# EAGLE board pcb.job (EAGLE 6.5.0)
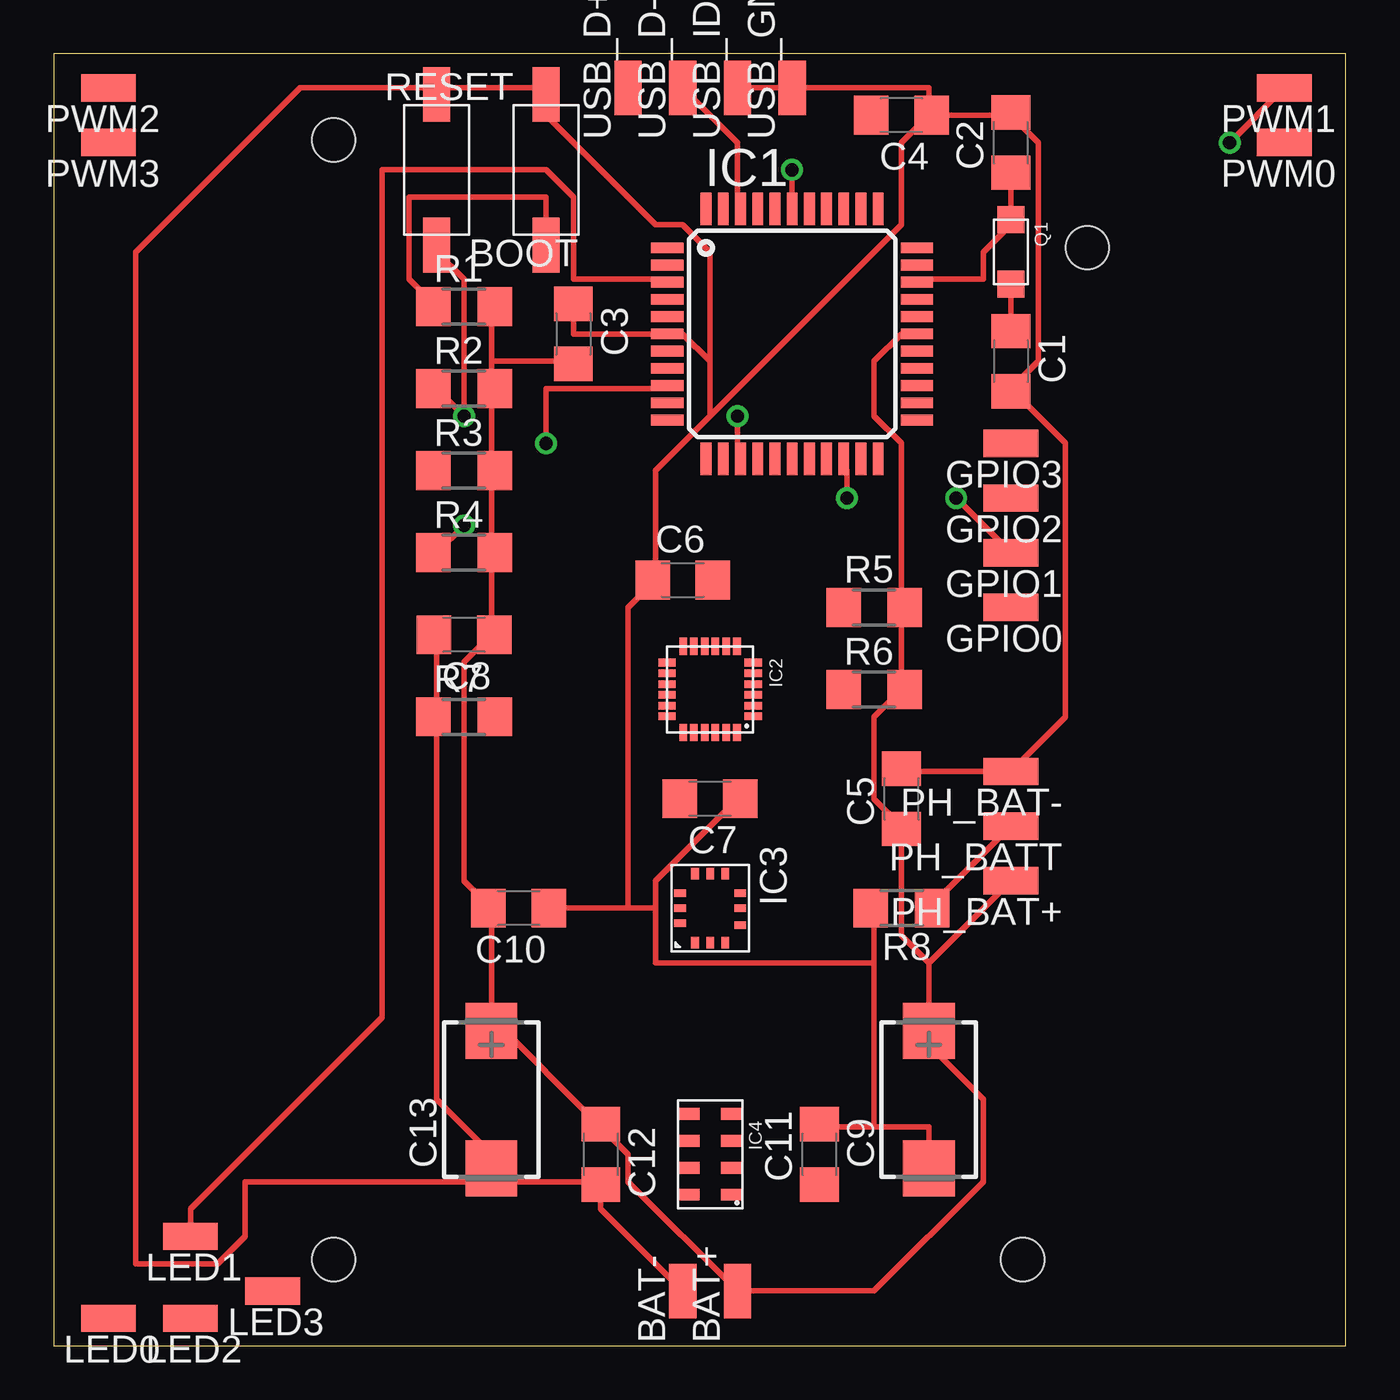
[diagram p0: board, top side]
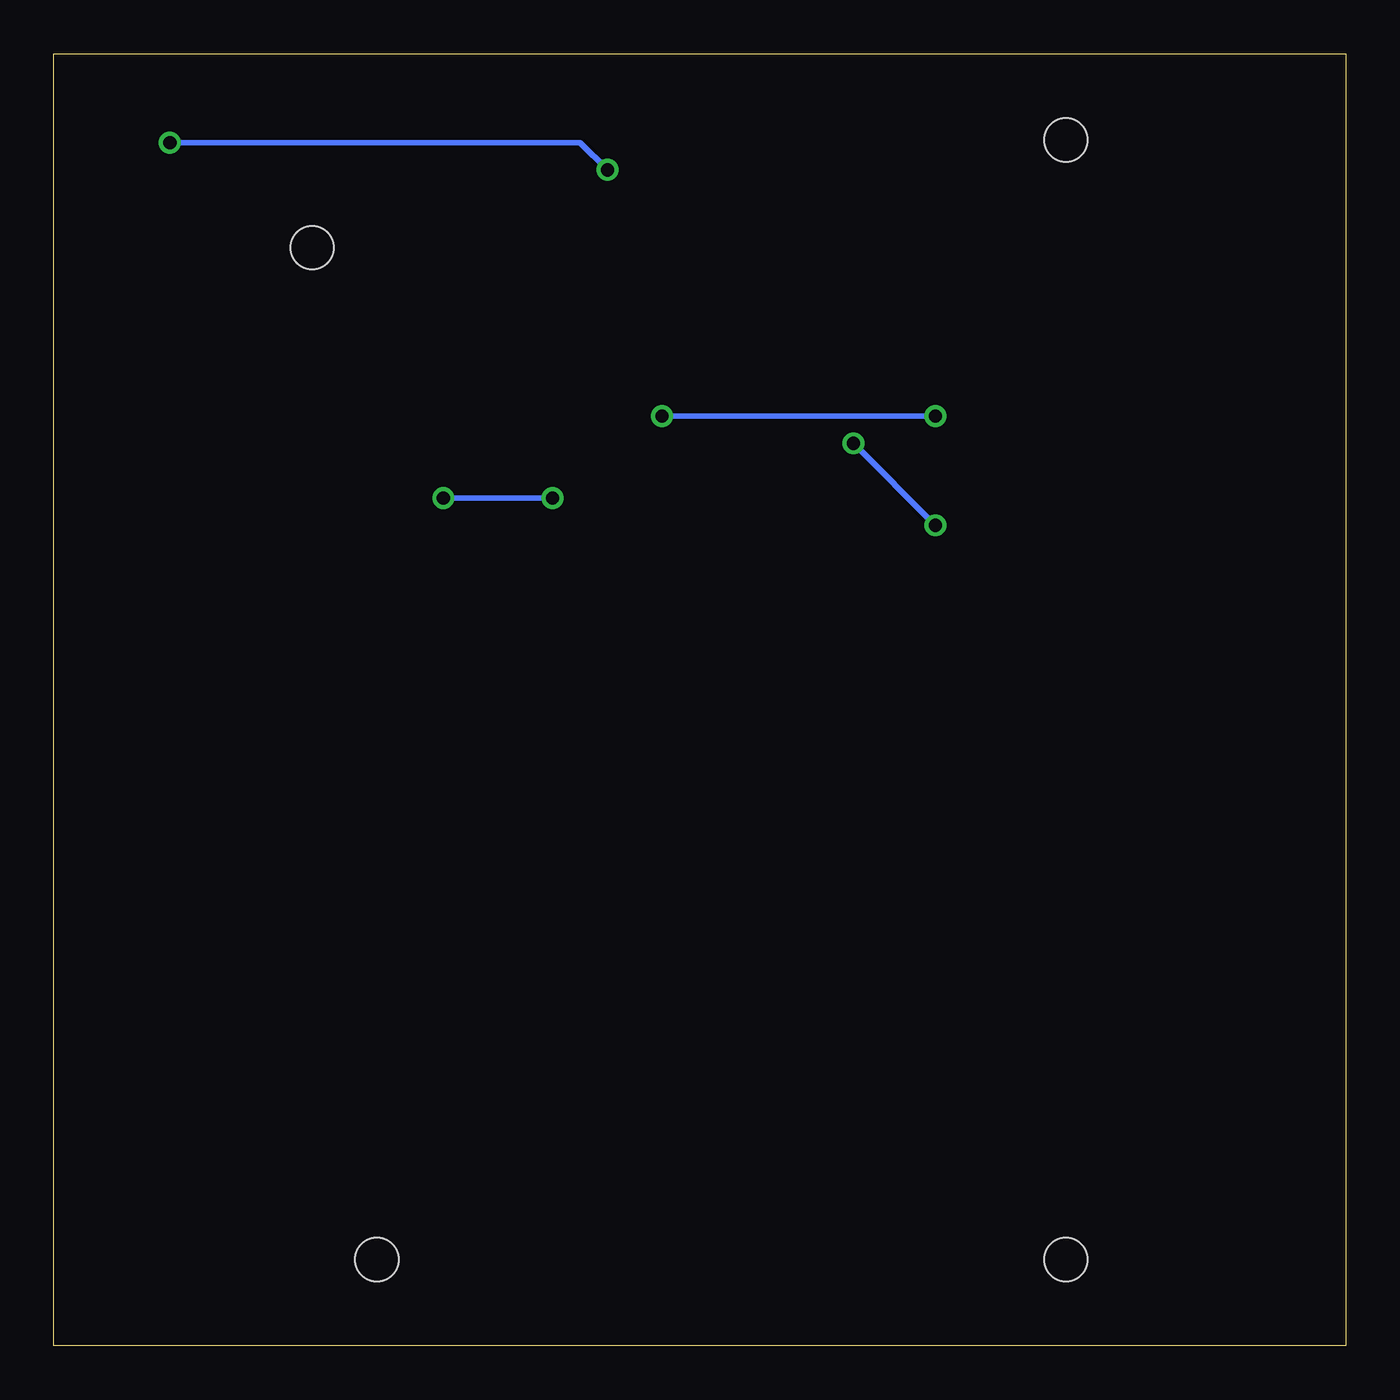
[diagram p1: board, bottom side, seen from below]

Size 60 x 60 mm. Coordinates in mm from the lower left corner, seen from the top.
Outline: 0,0 60,0 60,60 0,60 0,0
Copper layers (1*16): Top 0.035mm / dielectric 1.5mm / Bottom 0.035mm
Design rules "default": minimum track width 10mil, minimum drill 24mil, track to track 8mil, track to pad 8mil, pad to pad 8mil, via to via 8mil, smd to smd 8mil, copper to edge 40mil, drill to drill 8mil, minimum pad ring 10mil, minimum via ring 8mil, stop-mask expansion 4mil, vias tented up to drill 0mil, thermal gap 10mil
Holes 2 mm at 13,4 45,4 13,56 48,51

## Footprints (pad centres in the part's own frame; a part is rotated, then mirrored left to right if it is on the bottom)
SMD1,27-2,54 = smd 1.27 x 2.54: 1 0,0
SW2 = smd 1.27 x 2.54: 1 0,3.5; 2 0,-3.5
C1206 = smd 1.6 x 1.8: 1 -1.4,0; 2 1.4,0
CT7343 = smd 2.6 x 2.4: + 3.2,0; - -3.2,0
TQFP44 = smd 1.5 x 0.5: 1 -5.8,4; 2 -5.8,3.2; 3 -5.8,2.4; 4 -5.8,1.6; 5 -5.8,0.8; 6 -5.8,0; 7 -5.8,-0.8; 8 -5.8,-1.6; 9 -5.8,-2.4; 10 -5.8,-3.2; 11 -5.8,-4; 23 5.8,-4; 24 5.8,-3.2; 25 5.8,-2.4; 26 5.8,-1.6; 27 5.8,-0.8; 28 5.8,0; 29 5.8,0.8; 30 5.8,1.6; 31 5.8,2.4; 32 5.8,3.2; 33 5.8,4 | smd 0.5 x 1.5: 12 -4,-5.8; 13 -3.2,-5.8; 14 -2.4,-5.8; 15 -1.6,-5.8; 16 -0.8,-5.8; 17 0,-5.8; 18 0.8,-5.8; 19 1.6,-5.8; 20 2.4,-5.8; 21 3.2,-5.8; 22 4,-5.8; 34 4,5.8; 35 3.2,5.8; 36 2.4,5.8; 37 1.6,5.8; 38 0.8,5.8; 39 0,5.8; 40 -0.8,5.8; 41 -1.6,5.8; 42 -2.4,5.8; 43 -3.2,5.8; 44 -4,5.8
QFN24 = smd 0.8 x 0.35: 1 -2,1.25; 2 -2,0.75; 3 -2,0.25; 4 -2,-0.25; 5 -2,-0.75; 6 -2,-1.25; 13 2,-1.25; 14 2,-0.75; 15 2,-0.25; 16 2,0.25; 17 2,0.75; 18 2,1.25 | smd 0.35 x 0.8: 7 -1.25,-2; 8 -0.75,-2; 9 -0.25,-2; 10 0.25,-2; 11 0.75,-2; 12 1.25,-2; 19 1.25,2; 20 0.75,2; 21 0.25,2; 22 -0.25,2; 23 -0.75,2; 24 -1.25,2
LGA12 = smd 0.35 x 0.55: 1 0.7,1.6; 2 0,1.6; 3 -0.7,1.6; 7 -0.7,-1.6; 8 0,-1.6; 9 0.7,-1.6 | smd 0.55 x 0.35: 4 -1.4,0.8; 5 -1.4,0; 6 -1.4,-0.7; 10 1.4,-0.7; 11 1.4,0; 12 1.4,0.7
LGA8 = smd 1 x 0.55: 1 -1,1.875; 2 -1,0.625; 3 -1,-0.625; 4 -1,-1.875; 5 1,-1.875; 6 1,-0.625; 7 1,0.625; 8 1,1.875
Q = smd 1.27 x 1.27: 1 0,1.5; 2 0,-1.5
R1206 = smd 1.6 x 1.803: 1 -1.422,0; 2 1.422,0

## Placement (x,y rotation side)
BAT+  [SMD1,27-2,54]  31.75,2.54 0 top
BAT-  [SMD1,27-2,54]  29.21,2.54 0 top
BOOT  SW2  [SW2]  17.78,54.61 0 top
C1  22pF  [C1206]  44.45,45.72 270 top
C2  22pF  [C1206]  44.45,55.88 90 top
C3  100nF  [C1206]  24.13,46.99 270 top
C4  200nF  [C1206]  39.37,57.15 180 top
C5  100nF  [C1206]  39.37,25.4 90 top
C6  100nF  [C1206]  29.21,35.56 0 top
C7  2.2nF  [C1206]  30.48,25.4 180 top
C8  100nF  [C1206]  19.05,33.02 180 top
C9  4.7uF  [CT7343]  40.64,11.43 90 top
C10  100nF  [C1206]  21.59,20.32 180 top
C11  100nF  [C1206]  35.56,8.89 90 top
C12  100nF  [C1206]  25.4,8.89 270 top
C13  [CT7343]  20.32,11.43 90 top
GPIO0  [SMD1,27-2,54]  44.45,34.29 90 top
GPIO1  [SMD1,27-2,54]  44.45,36.83 90 top
GPIO2  [SMD1,27-2,54]  44.45,39.37 90 top
GPIO3  [SMD1,27-2,54]  44.45,41.91 90 top
IC1  PIC18F4550_TQFP  [TQFP44]  34.29,46.99 0 top
IC2  MPU6000  [QFN24]  30.48,30.48 180 top
IC3  AMI304  [LGA12]  30.48,20.32 180 top
IC4  MPL3115A2  [LGA8]  30.48,8.89 180 top
LED0  [SMD1,27-2,54]  2.54,1.27 90 top
LED1  [SMD1,27-2,54]  6.35,5.08 90 top
LED2  [SMD1,27-2,54]  6.35,1.27 90 top
LED3  [SMD1,27-2,54]  10.16,2.54 90 top
PH_BAT+  [SMD1,27-2,54]  44.45,21.59 90 top
PH_BAT-  [SMD1,27-2,54]  44.45,26.67 90 top
PH_BATT  [SMD1,27-2,54]  44.45,24.13 90 top
PWM0  [SMD1,27-2,54]  57.15,55.88 90 top
PWM1  [SMD1,27-2,54]  57.15,58.42 90 top
PWM2  [SMD1,27-2,54]  2.54,58.42 90 top
PWM3  [SMD1,27-2,54]  2.54,55.88 90 top
Q1  16MHz  [Q]  44.45,50.8 180 top
R1  10K  [R1206]  19.05,48.26 0 top
R2  10K  [R1206]  19.05,44.45 0 top
R3  [R1206]  19.05,40.64 0 top
R4  [R1206]  19.05,36.83 0 top
R5  [R1206]  38.1,34.29 0 top
R6  [R1206]  38.1,30.48 0 top
R7  [R1206]  19.05,29.21 0 top
R8  [R1206]  39.37,20.32 180 top
RESET  SW2  [SW2]  22.86,54.61 180 top
USB_D+  [SMD1,27-2,54]  26.67,58.42 0 top
USB_D-  [SMD1,27-2,54]  29.21,58.42 0 top
USB_GND  [SMD1,27-2,54]  34.29,58.42 0 top
USB_ID  [SMD1,27-2,54]  31.75,58.42 0 top

## Library data of the parts
BAT+ BAT- GPIO0 GPIO1-GPIO3 LED0 LED1-LED3 PH_BAT+ PH_BAT- PH_BATT PWM0 PWM1-PWM3 USB_D+ USB_D- USB_GND USB_ID = wirepad
BOOT Q1 RESET = utils
C1-C8 C10-C12 = rcl
C9 C13 R1-R8 = resistor
IC1 = microchip; MF: MICROCHIP; MPN: PIC18F4550-I/PT; OC_FARNELL: 9321365; OC_NEWARK: 08J9633
IC2-IC4 = sensors

## Nets
AUX_SCL: IC2.7 IC3.4 IC4.8 R6.1
AUX_SDA: IC2.6 IC3.12 IC4.7 R5.1
GND: BAT-.1 BOOT.1 C1.2 C2.2 C3.1 C4.1 C5.2 C6.1 C7.1 C8.2 C9.- C10.1 C11.2 C12.2 C13.- IC1.6 IC1.29 IC2.1 IC2.3 IC2.4 IC2.15 IC2.16 IC2.18 IC3.2 IC3.6 IC3.7 IC4.3 PH_BAT-.1 R7.1 R8.2 RESET.2 USB_GND.1 USB_ID.1
GPIO0: GPIO0.1 IC1.19
GPIO1: GPIO1.1 IC1.20
GPIO2: GPIO2.1 IC1.21
GPIO3: GPIO3.1 IC1.22
GPIO4: IC1.23
GPIO5: IC1.24
GPIO6: IC1.25
GPIO7: IC1.26
GPIO8: IC1.27
GPIO9: IC1.32
GPIO10: IC1.35
GPIO11: IC1.36
GPIO12: IC1.44
GPIO13: IC1.1
IMU_FSYNC: IC1.11 IC2.11 R7.2
IMU_INT: IC1.10 IC2.12
LED0: IC1.2 LED0.1
LED1: IC1.3 LED1.1
LED2: IC1.4 LED2.1
LED3: IC1.5 LED3.1
MAIN_SCL: IC1.9 IC2.23 R4.1
MAIN_SDA: IC1.8 IC2.24 R3.1
N$1: C1.1 IC1.30 Q1.1
N$2: C6.2 IC2.10
N$3: C4.2 IC1.37
N$4: C2.1 IC1.31 Q1.2
N$5: BOOT.2 IC1.14 R2.1
N$6: C7.2 IC2.20
N$7: C11.1 IC4.2
N$10: PH_BATT.1 R8.1
PGC: IC1.16
PGD: IC1.17
PWM0: IC1.38 PWM0.1
PWM1: IC1.39 PWM1.1
PWM2: IC1.40 PWM2.1
PWM3: IC1.41 PWM3.1
USB_D+: IC1.43 USB_D+.1
USB_D-: IC1.42 USB_D-.1
VDD: BAT+.1 C3.2 C5.1 C8.1 C9.+ C10.2 C12.1 C13.+ IC1.7 IC1.28 IC2.8 IC2.9 IC2.13 IC3.1 IC3.3 IC4.1 IC4.4 PH_BAT+.1 R1.2 R2.2 R3.2 R4.2 R5.2 R6.2
VPP: IC1.18 R1.1 RESET.1

## Tracks (layer width: path | path; a pad name or v marks a point on that pad's centre or on a via)
GND
  Top 0.254: C5.2 39.37,26.67 PH_BAT-.1 46.99,29.21 46.99,41.91 44.45,44.45 | USB_ID.1 USB_GND.1 40.64,58.42 40.64,57.15 | 44.45,44.45 45.72,45.72 45.72,55.88 44.45,57.15 | 44.45,57.15 C4.1 40.64,57.15 | 44.45,57.15 C2.2 | 44.45,44.45 C1.2 | 17.78,29.21 17.78,33.02 C8.2 | 20.32,7.62 25.4,7.62 C12.2 25.4,6.35 BAT-.1 | 17.78,29.21 17.78,11.43 20.32,8.89 C13.- 20.32,7.62 | 17.78,29.21 R7.1 | 38.1,10.16 40.64,10.16 C9.- | 38.1,10.16 35.56,10.16 C11.2 | 38.1,10.16 38.1,17.78 | 38.1,17.78 38.1,20.32 R8.2 | 17.78,58.42 22.86,58.42 RESET.2 22.86,57.15 27.94,52.07 29.21,52.07 30.48,50.8 30.48,45.72 | C3.1 24.13,46.99 IC1.6 29.21,46.99 30.48,45.72 | 27.94,20.32 26.67,20.32 | 26.67,20.32 C10.1 22.86,20.32 | 27.94,20.32 27.94,21.59 31.75,25.4 C7.1 | 27.94,35.56 26.67,34.29 26.67,20.32 | 30.48,43.18 30.48,45.72 | 30.48,43.18 27.94,40.64 27.94,35.56 | 27.94,35.56 C6.1 | 38.1,17.78 27.94,17.78 27.94,20.32 | 20.32,7.62 8.89,7.62 8.89,5.08 7.62,3.81 3.81,3.81 3.81,50.8 11.43,58.42 17.78,58.42 | 17.78,58.42 BOOT.1 | 40.64,57.15 39.37,55.88 39.37,52.07 30.48,43.18
GPIO1  (via drill 0.61)
  Top 0.254: v36.83,39.37 36.83,40.64 IC1.20 | GPIO1.1 v41.91,39.37
  Bottom 0.254: v41.91,39.37 v36.83,39.37
LED1
  Top 0.254: LED1.1 6.35,6.35 15.24,15.24 15.24,54.61 22.86,54.61 24.13,53.34 24.13,49.53 27.94,49.53 IC1.3
MAIN_SCL  (via drill 0.61)
  Top 0.254: v22.86,41.91 22.86,44.45 27.94,44.45 IC1.9 | v19.05,38.1 17.78,36.83 R4.1
  Bottom 0.254: v19.05,38.1 v22.86,41.91
N$1
  Top 0.254: 44.45,49.53 Q1.1 C1.1 44.45,46.99
N$4
  Top 0.254: 44.45,54.61 C2.1 Q1.2 44.45,52.07 43.18,50.8 43.18,49.53 40.64,49.53 IC1.31
N$5  (via drill 0.61)
  Top 0.254: v31.75,43.18 31.75,41.91 IC1.14 | R2.1 17.78,44.45 v19.05,43.18 19.05,49.53 17.78,50.8 BOOT.2
  Bottom 0.254: v19.05,43.18 v31.75,43.18
N$10
  Top 0.254: PH_BATT.1 40.64,20.32 R8.1
PWM1  (via drill 0.61)
  Top 0.254: v34.29,54.61 IC1.39 | PWM1.1 v54.61,55.88
  Bottom 0.254: v34.29,54.61 35.56,55.88 v54.61,55.88
USB_D-
  Top 0.254: USB_D-.1 31.75,55.88 31.75,53.34 IC1.42
VDD
  Top 0.254: 40.64,17.78 PH_BAT+.1 | 40.64,17.78 C9.+ 40.64,13.97 43.18,11.43 43.18,7.62 38.1,2.54 BAT+.1 26.67,7.62 26.67,8.89 25.4,10.16 | 39.37,30.48 38.1,29.21 38.1,25.4 39.37,24.13 C5.1 39.37,19.05 40.64,17.78 | 39.37,34.29 39.37,41.91 38.1,43.18 38.1,45.72 39.37,46.99 IC1.28 | 39.37,34.29 39.37,30.48 | 39.37,30.48 R6.2 | 39.37,34.29 R5.2 | 20.32,36.83 20.32,33.02 | 20.32,45.72 24.13,45.72 C3.2 | 20.32,44.45 20.32,45.72 | 20.32,44.45 20.32,40.64 | 20.32,44.45 R2.2 | 20.32,45.72 20.32,48.26 R1.2 | 20.32,40.64 20.32,36.83 | 20.32,36.83 R4.2 | 20.32,40.64 R3.2 | 20.32,15.24 20.32,20.32 | 20.32,15.24 25.4,10.16 | 20.32,15.24 C13.+ | 25.4,10.16 C12.1 | 20.32,33.02 19.05,31.75 19.05,21.59 20.32,20.32 | 20.32,33.02 C8.1 | 20.32,20.32 C10.2
VPP
  Top 0.254: RESET.1 22.86,53.34 16.51,53.34 16.51,49.53 17.78,48.26 R1.1